# Altium PCB tester_czolo.PcbDoc
Units mm, origin at the board's own origin, x right, y up, seen from the top; angles counter-clockwise.
Board outline 270 x 185 mm, 2 copper layers (Top Layer, Bottom Layer); 28 components, 0 nets, 0 pads, 0 vias.
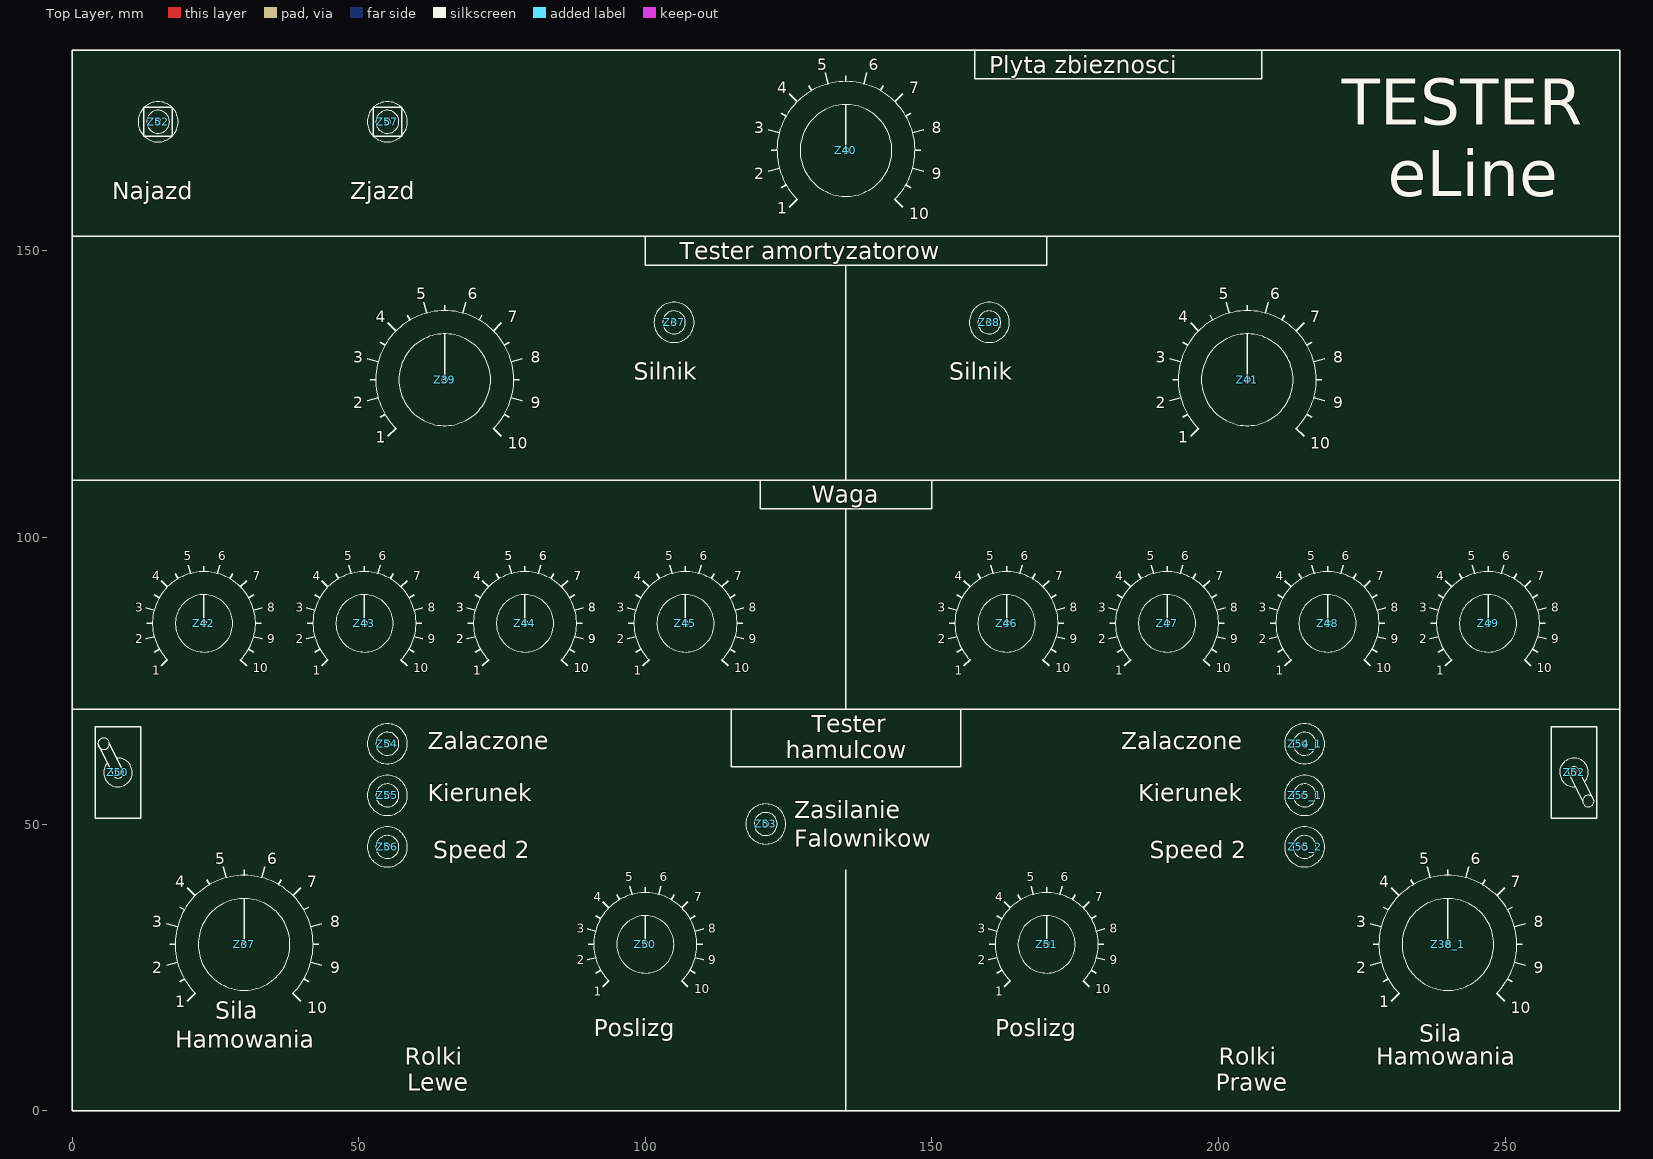
[diagram p0: Top Layer view]
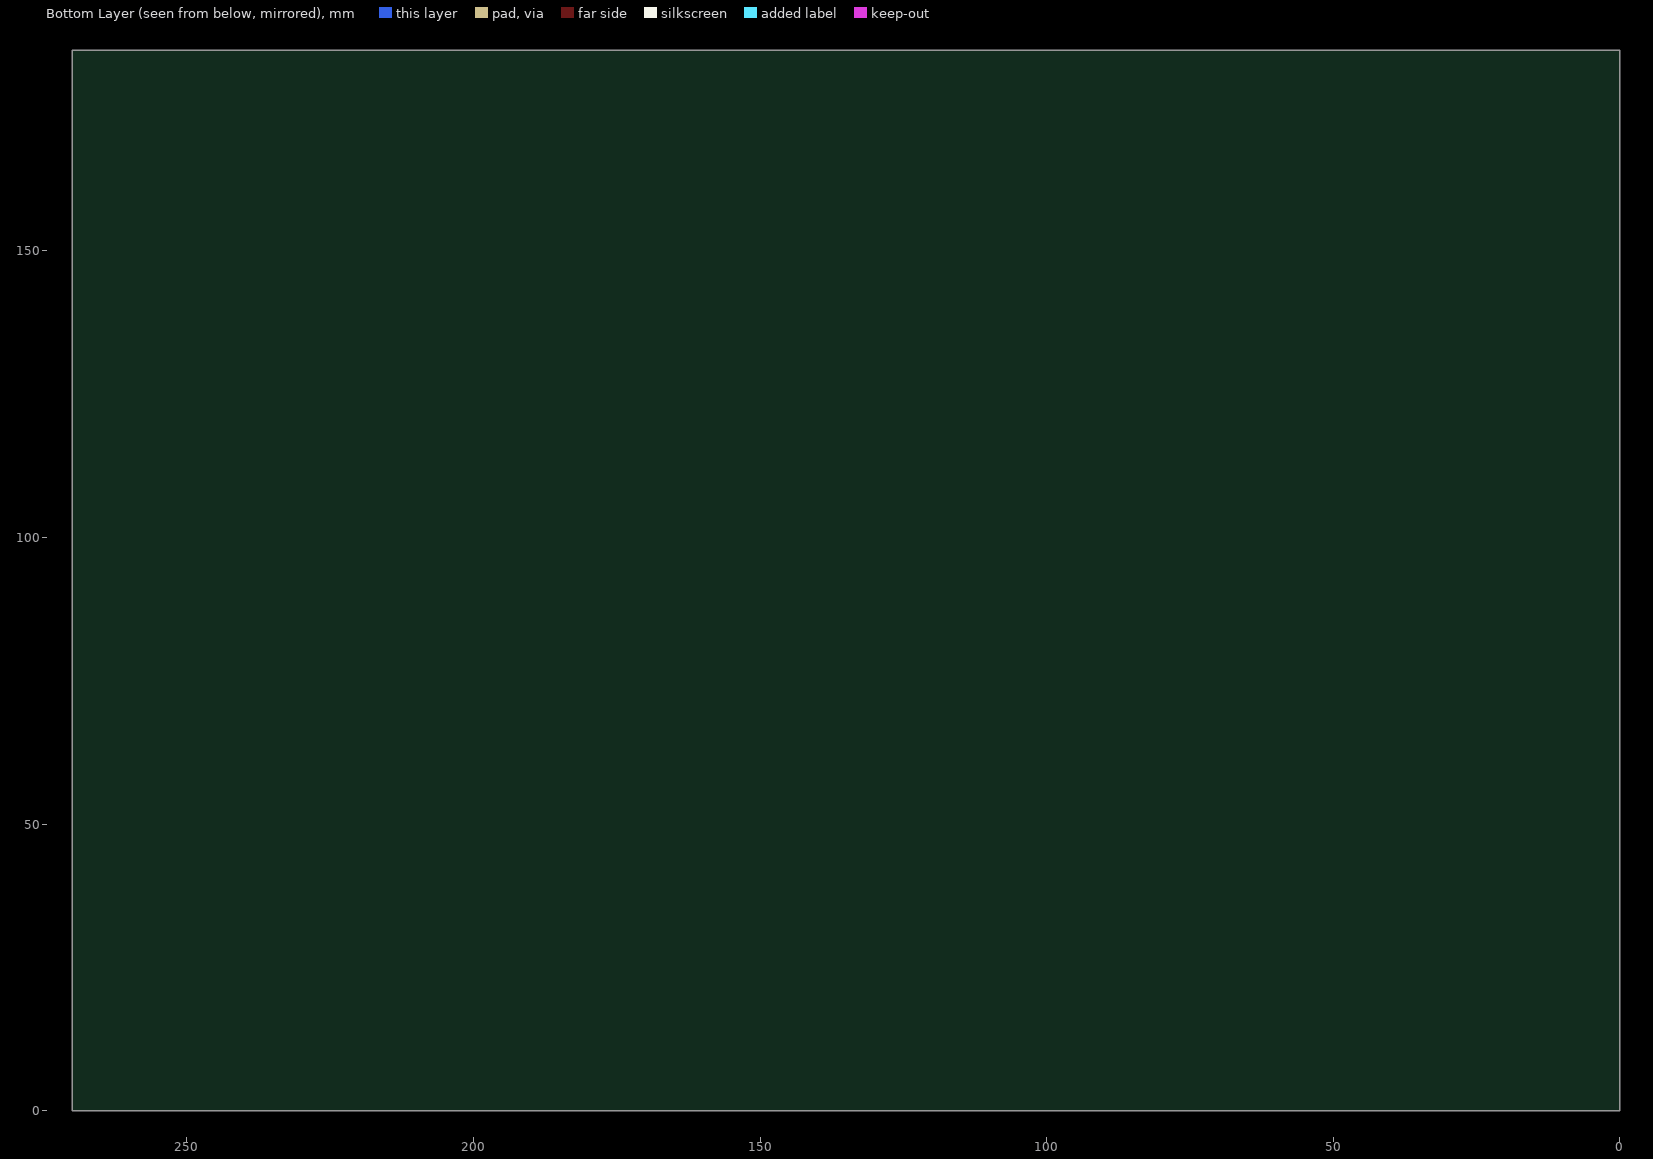
[diagram p1: Bottom Layer view, seen from below]

## Layer stack, top to bottom
Top Layer: signal copper 0.0356
Dielectric: dielectric 0.32, FR-4, Dk 4.8
Bottom Layer: signal copper 0.0356

## Board outline
0,0 0,185 270,185 270,0

## Design rules (kind name [scope] priority, off if disabled: settings)
Clearance [All] p1: gap=0.254
PolygonConnect [All] p1: connectstyle=Relief reliefconductorwidth=0.254 reliefentries=4 polygonreliefangle="90 Angle"
RoutingVias [All] p1: holewidth=0.711 width=1.27 viastyle="Through Hole" minholewidth=0.711 minwidth=1.27 maxholewidth=0.711 maxwidth=1.27
SilkscreenOverComponentPads [All] p1: minsilkscreentomaskgap=0.254
SolderMaskExpansion [All] p1: expansion=0.102
Width [All] p1: maxlimit=0.254 minlimit=0.254 preferedwidth=0.254
27 further rules are at their usual default settings.

## Components (designator, comment, footprint, x,y, rotation, side; value= is the part's Value field where it differs from the comment)
Z37 "Comment" MECH_POT 30,29 r0 top
Z37 "Comment" MECH_LED 105,137.5 r0 top
Z38 "Comment" MECH_LED 160,137.5 r0 top
Z38_1 "Comment" MECH_POT 240,29 r0 top
Z39 "Comment" MECH_POT 65,127.5 r0 top
Z40 "Comment" MECH_POT 135,167.5 r0 top
Z41 "Comment" MECH_POT 205,127.5 r0 top
Z42 "Comment" MECH_POT2 23,85 r0 top
Z43 "Comment" MECH_POT2 51,85 r0 top
Z44 "Comment" MECH_POT2 79,85 r0 top
Z45 "Comment" MECH_POT2 107,85 r0 top
Z46 "Comment" MECH_POT2 163,85 r0 top
Z47 "Comment" MECH_POT2 191,85 r0 top
Z48 "Comment" MECH_POT2 219,85 r0 top
Z49 "Comment" MECH_POT2 247,85 r0 top
Z50 "Comment" MECH_POT2 100,29 r0 top
Z50 "Comment" MECH_SW 8,59 r0 top
Z51 "Comment" MECH_POT2 170,29 r0 top
Z52 "Comment" MECH_SW 262,59 r180 top
Z52 "Comment" MECH_PB 15,172.5 r0 top
Z53 "Comment" MECH_LED 121,50 r0 top
Z54 "Comment" MECH_LED 55,64 r0 top
Z54_1 "Comment" MECH_LED 215,64 r180 top
Z55 "Comment" MECH_LED 55,55 r0 top
Z55_1 "Comment" MECH_LED 215,55 r180 top
Z55_2 "Comment" MECH_LED 215,46 r180 top
Z56 "Comment" MECH_LED 55,46 r0 top
Z57 "Comment" MECH_PB 55,172.5 r0 top

## Footprints (in the part's own frame and the unit in brackets; to place one, negate y for a bottom-side part, rotate by r counter-clockwise, add the part's x,y. Pads: shape width x height; smd on the part's side, far side on the other; paste and mask are expansions set on the pad)
MECH_LED [mm]
  silkscreen extent -3.5,-3.5 3.5,3.5
MECH_PB [mm]
  silkscreen extent -3.5,-3.5 3.5,3.5
MECH_POT [mm]
  silkscreen extent -13.52,-9.9 13.52,13.52
MECH_POT2 [mm]
  silkscreen extent -10.14,-7.42 10.14,10.14
MECH_SW [mm]
  silkscreen extent -4,-8 4,8

## Nets (pads, with @x,y where several pads share a name; then routed paths per layer and width w, separated by ;. In a path a pad name is that pad's centre, name@x,y a point inside that pad or via, vN(x,y) a via of type N, cw(c..) or ccw(c..) an arc to the next point about the centre after c; other vN are vias at no path point)

## Silkscreen, mask and mechanical layers (free items; w line width, h text height)
Top Overlay:
  lines w0.2: 72.636,78.636 cw(c79,85) 85.364,78.636
  lines w0.254: 0,70 270,70 ; 0,110 270,110 ; 0,152.5 270,152.5 ; 68.858,82.282 70.307,82.671 ; 68.858,87.718 70.307,87.329 ; 69,85 70,85 ; 70.34,80 71.206,80.5 ; 70.34,90 71.206,89.5 ; 71.575,77.575 72.636,78.636 ; 76.282,95.142 76.671,93.693 ; 79,94 79,95 ; 81.329,93.693 81.718,95.142 ; 83.5,92.794 84,93.66 ; 85.364,78.636 86.425,77.575 ; 85.364,91.364 86.425,92.425 ; 86.794,80.5 87.66,80 ; 86.794,89.5 87.66,90 ; 87.693,82.671 89.142,82.282 ; 87.693,87.329 89.142,87.718 ; 88,85 89,85 ; 100,152.5 100,147.5 170,147.5 170,152.5 ; 115,70 115,60 155,60 155,70 ; 120,110 120,105 150,105 150,110 ; 135,0 135,42 ; 135,70 135,105 ; 135,110 135,147.5 ; 157.5,185 157.5,180 207.5,180 207.5,185 ; 0,0 0,185 270,185 270,0 0,0 ; 71.575,92.425 72.636,91.364 71.575,92.425 ; 74,93.66 74.5,92.794 74,93.66
  text "Plyta zbieznosci" at 160,181 h3
  text "TESTER" at 221.5,172 h8
  text "eLine" at 229.5,159.5 h8
  text "Najazd" at 7,159 h3
  text "Zjazd" at 48.5,159 h3
  text "Tester amortyzatorow" at 106,148.5 h3
  text "Silnik" at 98,127.5 h3
  text "Silnik" at 153,127.5 h3
  text "Waga" at 129,106 h3
  text "5" at 75.5,96 h1.5
  text "6" at 81.5,96 h1.5
  text "4" at 70,92.5 h1.5
  text "7" at 87.5,92.5 h1.5
  text "3" at 67,87 h1.5
  text "8" at 90,87 h1.5
  text "2" at 67,81.5 h1.5
  text "9" at 90,81.5 h1.5
  text "10" at 87.5,76.5 h1.5
  text "1" at 70,76 h1.5
  text "Tester" at 129,66 h3
  text "Zalaczone" at 62,63 h3
  text "Zalaczone" at 183,63 h3
  text "hamulcow" at 124.5,61.5 h3
  text "Kierunek" at 62,54 h3
  text "Kierunek" at 186,54 h3
  text "Zasilanie" at 126,51 h3
  text "Falownikow" at 126,46 h3
  text "Speed 2" at 63,44 h3
  text "Speed 2" at 188,44 h3
  text "Sila" at 25,16 h3
  text "Poslizg" at 91,13 h3
  text "Poslizg" at 161,13 h3
  text "Sila" at 235,12 h3
  text "Hamowania" at 18,11 h3
  text "Rolki" at 58,8 h3
  text "Rolki" at 200,8 h3
  text "Hamowania" at 227.5,8 h3
  text "Lewe" at 58.5,3.5 h3
  text "Prawe" at 199.5,3.5 h3

## Text inside footprints (layer, text, board x,y; h text height)
Z37: Top Overlay "10" at 41,17 h2; Top Overlay "9" at 45,24 h2; Top Overlay "8" at 45,32 h2; Top Overlay "7" at 41,39 h2; Top Overlay "6" at 34,43 h2; Top Overlay "5" at 25,43 h2; Top Overlay "4" at 18,39 h2; Top Overlay "3" at 14,32 h2; Top Overlay "2" at 14,24 h2; Top Overlay "1" at 18,18 h2
Z38_1: Top Overlay "10" at 251,17 h2; Top Overlay "9" at 255,24 h2; Top Overlay "8" at 255,32 h2; Top Overlay "7" at 251,39 h2; Top Overlay "6" at 244,43 h2; Top Overlay "5" at 235,43 h2; Top Overlay "4" at 228,39 h2; Top Overlay "3" at 224,32 h2; Top Overlay "2" at 224,24 h2; Top Overlay "1" at 228,18 h2
Z39: Top Overlay "1" at 53,116.5 h2; Top Overlay "2" at 49,122.5 h2; Top Overlay "3" at 49,130.5 h2; Top Overlay "4" at 53,137.5 h2; Top Overlay "5" at 60,141.5 h2; Top Overlay "6" at 69,141.5 h2; Top Overlay "7" at 76,137.5 h2; Top Overlay "8" at 80,130.5 h2; Top Overlay "9" at 80,122.5 h2; Top Overlay "10" at 76,115.5 h2
Z40: Top Overlay "1" at 123,156.5 h2; Top Overlay "2" at 119,162.5 h2; Top Overlay "3" at 119,170.5 h2; Top Overlay "4" at 123,177.5 h2; Top Overlay "5" at 130,181.5 h2; Top Overlay "6" at 139,181.5 h2; Top Overlay "7" at 146,177.5 h2; Top Overlay "8" at 150,170.5 h2; Top Overlay "9" at 150,162.5 h2; Top Overlay "10" at 146,155.5 h2
Z41: Top Overlay "10" at 216,115.5 h2; Top Overlay "9" at 220,122.5 h2; Top Overlay "8" at 220,130.5 h2; Top Overlay "7" at 216,137.5 h2; Top Overlay "6" at 209,141.5 h2; Top Overlay "5" at 200,141.5 h2; Top Overlay "4" at 193,137.5 h2; Top Overlay "3" at 189,130.5 h2; Top Overlay "2" at 189,122.5 h2; Top Overlay "1" at 193,116.5 h2
Z42: Top Overlay "10" at 31.5,76.5 h1.5; Top Overlay "9" at 34,81.5 h1.5; Top Overlay "8" at 34,87 h1.5; Top Overlay "7" at 31.5,92.5 h1.5; Top Overlay "6" at 25.5,96 h1.5; Top Overlay "5" at 19.5,96 h1.5; Top Overlay "4" at 14,92.5 h1.5; Top Overlay "3" at 11,87 h1.5; Top Overlay "2" at 11,81.5 h1.5; Top Overlay "1" at 14,76 h1.5
Z43: Top Overlay "1" at 42,76 h1.5; Top Overlay "2" at 39,81.5 h1.5; Top Overlay "3" at 39,87 h1.5; Top Overlay "4" at 42,92.5 h1.5; Top Overlay "5" at 47.5,96 h1.5; Top Overlay "6" at 53.5,96 h1.5; Top Overlay "7" at 59.5,92.5 h1.5; Top Overlay "8" at 62,87 h1.5; Top Overlay "9" at 62,81.5 h1.5; Top Overlay "10" at 59.5,76.5 h1.5
Z44: Top Overlay "10" at 87.5,76.5 h1.5; Top Overlay "9" at 90,81.5 h1.5; Top Overlay "8" at 90,87 h1.5; Top Overlay "7" at 87.5,92.5 h1.5; Top Overlay "6" at 81.5,96 h1.5; Top Overlay "5" at 75.5,96 h1.5; Top Overlay "4" at 70,92.5 h1.5; Top Overlay "3" at 67,87 h1.5; Top Overlay "2" at 67,81.5 h1.5; Top Overlay "1" at 70,76 h1.5
Z45: Top Overlay "1" at 98,76 h1.5; Top Overlay "2" at 95,81.5 h1.5; Top Overlay "3" at 95,87 h1.5; Top Overlay "4" at 98,92.5 h1.5; Top Overlay "5" at 103.5,96 h1.5; Top Overlay "6" at 109.5,96 h1.5; Top Overlay "7" at 115.5,92.5 h1.5; Top Overlay "8" at 118,87 h1.5; Top Overlay "9" at 118,81.5 h1.5; Top Overlay "10" at 115.5,76.5 h1.5
Z46: Top Overlay "10" at 171.5,76.5 h1.5; Top Overlay "9" at 174,81.5 h1.5; Top Overlay "8" at 174,87 h1.5; Top Overlay "7" at 171.5,92.5 h1.5; Top Overlay "6" at 165.5,96 h1.5; Top Overlay "5" at 159.5,96 h1.5; Top Overlay "4" at 154,92.5 h1.5; Top Overlay "3" at 151,87 h1.5; Top Overlay "2" at 151,81.5 h1.5; Top Overlay "1" at 154,76 h1.5
Z47: Top Overlay "1" at 182,76 h1.5; Top Overlay "2" at 179,81.5 h1.5; Top Overlay "3" at 179,87 h1.5; Top Overlay "4" at 182,92.5 h1.5; Top Overlay "5" at 187.5,96 h1.5; Top Overlay "6" at 193.5,96 h1.5; Top Overlay "7" at 199.5,92.5 h1.5; Top Overlay "8" at 202,87 h1.5; Top Overlay "9" at 202,81.5 h1.5; Top Overlay "10" at 199.5,76.5 h1.5
Z48: Top Overlay "10" at 227.5,76.5 h1.5; Top Overlay "9" at 230,81.5 h1.5; Top Overlay "8" at 230,87 h1.5; Top Overlay "7" at 227.5,92.5 h1.5; Top Overlay "6" at 221.5,96 h1.5; Top Overlay "5" at 215.5,96 h1.5; Top Overlay "4" at 210,92.5 h1.5; Top Overlay "3" at 207,87 h1.5; Top Overlay "2" at 207,81.5 h1.5; Top Overlay "1" at 210,76 h1.5
Z49: Top Overlay "1" at 238,76 h1.5; Top Overlay "2" at 235,81.5 h1.5; Top Overlay "3" at 235,87 h1.5; Top Overlay "4" at 238,92.5 h1.5; Top Overlay "5" at 243.5,96 h1.5; Top Overlay "6" at 249.5,96 h1.5; Top Overlay "7" at 255.5,92.5 h1.5; Top Overlay "8" at 258,87 h1.5; Top Overlay "9" at 258,81.5 h1.5; Top Overlay "10" at 255.5,76.5 h1.5
Z50: Top Overlay "10" at 108.5,20.5 h1.5; Top Overlay "9" at 111,25.5 h1.5; Top Overlay "8" at 111,31 h1.5; Top Overlay "7" at 108.5,36.5 h1.5; Top Overlay "6" at 102.5,40 h1.5; Top Overlay "5" at 96.5,40 h1.5; Top Overlay "4" at 91,36.5 h1.5; Top Overlay "3" at 88,31 h1.5; Top Overlay "2" at 88,25.5 h1.5; Top Overlay "1" at 91,20 h1.5
Z51: Top Overlay "1" at 161,20 h1.5; Top Overlay "2" at 158,25.5 h1.5; Top Overlay "3" at 158,31 h1.5; Top Overlay "4" at 161,36.5 h1.5; Top Overlay "5" at 166.5,40 h1.5; Top Overlay "6" at 172.5,40 h1.5; Top Overlay "7" at 178.5,36.5 h1.5; Top Overlay "8" at 181,31 h1.5; Top Overlay "9" at 181,25.5 h1.5; Top Overlay "10" at 178.5,20.5 h1.5